# EAGLE board controller (EAGLE 9.6.2)
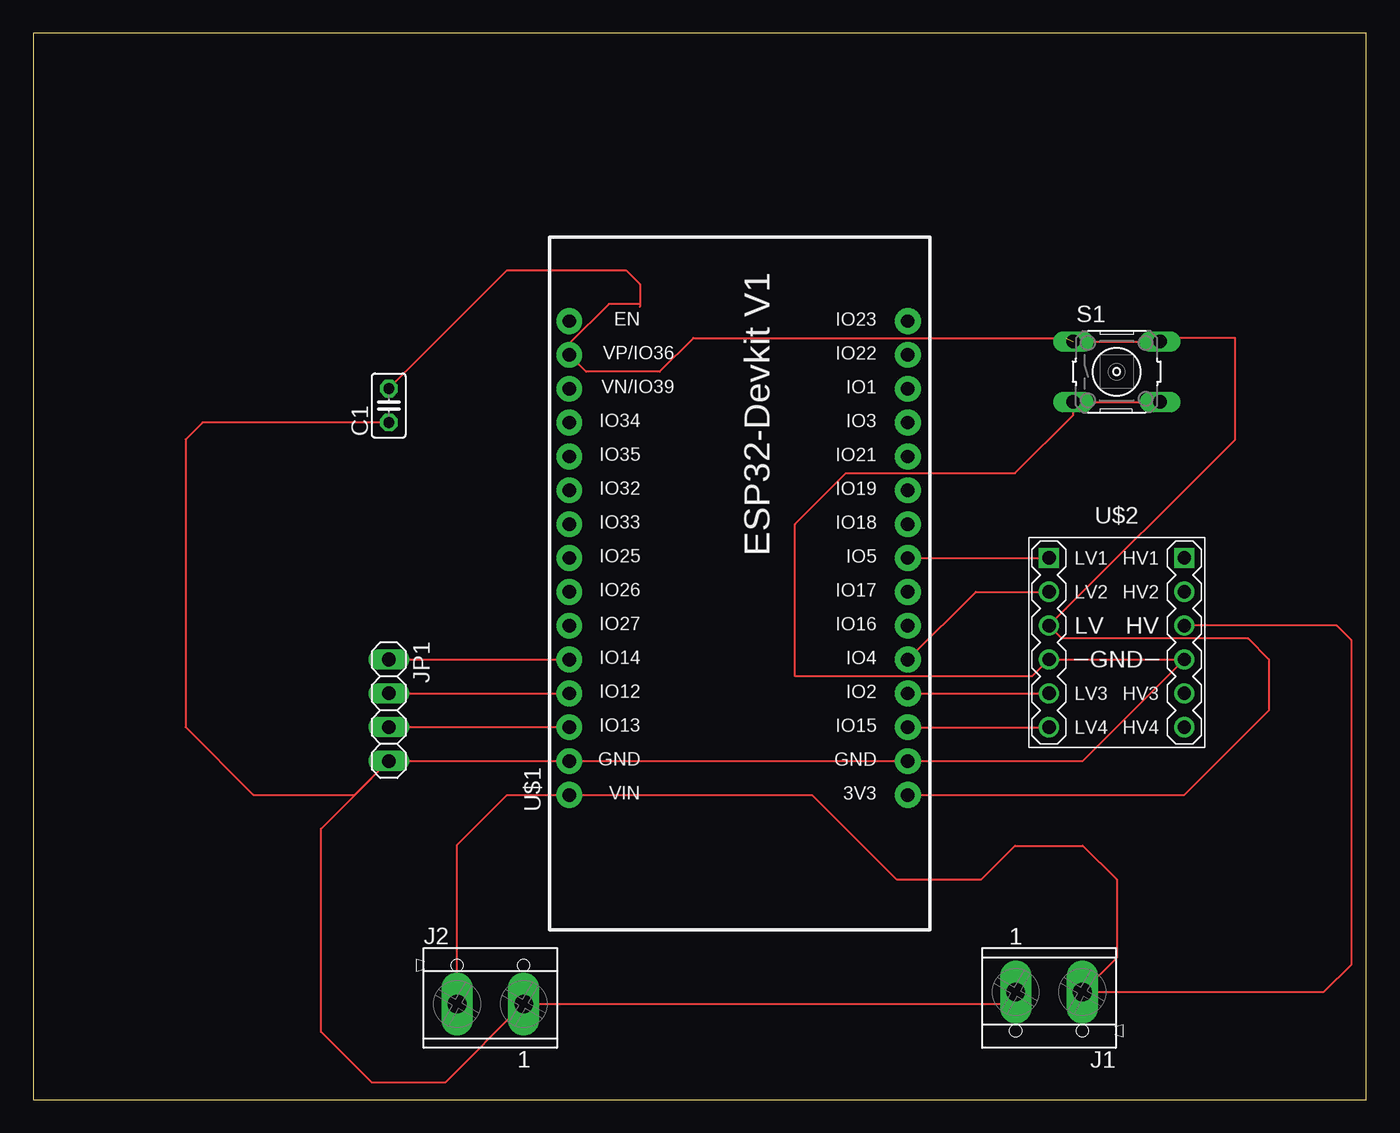
[diagram p0: board, top side]

Size 100 x 80 mm. Coordinates in mm from the lower left corner, seen from the top.
Outline: 0,0 100,0 100,80 0,80 0,0
Copper layers (1*16): Top 0.035mm / dielectric 1.5mm / Bottom 0.035mm
Design rules "default": minimum track width 6mil, minimum drill 0.35mm, track to track 6mil, track to pad 6mil, pad to pad 6mil, via to via 6mil, smd to smd 6mil, copper to edge 40mil, drill to drill 6mil, minimum pad ring 10mil, minimum via ring 8mil, stop-mask expansion 4mil, vias tented up to drill 0mil, thermal gap 10mil

## Footprints (pad centres in the part's own frame; a part is rotated, then mirrored left to right if it is on the bottom)
C025-025X050 = drill 0.813 octagon: 1 -1.27,0; 2 1.27,0
TERMINAL_BLOCK_2P_5 = drill 1.4 pad 2.38 long: 1 2.5,-0.45; 2 -2.5,-0.45
1X04 = drill 1.016 long: 1 -3.81,0; 2 -1.27,0; 3 1.27,0; 4 3.81,0
B3F-10XX = drill 1.016 long: 1 -3.251,2.261; 2 3.251,2.261; 3 -3.251,-2.261; 4 3.251,-2.261
ESP32-DEVKITV1 = drill 1 pad 1.93: 3V3 -16.52,-12.27; D1 13.96,-12.27; D2 -8.9,-12.27; D3 11.42,-12.27; D4 -6.36,-12.27; D5 1.26,-12.27; D12 -8.9,13.135; D13 -11.44,13.135; D14 -6.36,13.135; D15 -11.44,-12.27; D16 -3.82,-12.27; D17 -1.28,-12.27; D18 3.8,-12.27; D19 6.34,-12.27; D21 8.88,-12.27; D22 16.5,-12.27; D23 19.04,-12.27; D25 1.26,13.135; D26 -1.28,13.135; D27 -3.82,13.135; D32 6.34,13.135; D33 3.8,13.135; D34 11.42,13.135; D35 8.88,13.135; D36 16.5,13.135; D39 13.96,13.135; EN 19.04,13.135; GND@1 -13.98,13.135; GND@2 -13.98,-12.27; VIN -16.52,13.135
LEVEL-SHIFTER-4CH = drill 1 square: J1.1 -5.08,6.35; J2.1 5.08,6.35 | drill 1: J1.2 -5.08,3.81; J1.3 -5.08,1.27; J1.4 -5.08,-1.27; J1.5 -5.08,-3.81; J1.6 -5.08,-6.35; J2.2 5.08,3.81; J2.3 5.08,1.27; J2.4 5.08,-1.27; J2.5 5.08,-3.81; J2.6 5.08,-6.35

## Placement (x,y rotation side)
C1  [C025-025X050]  26.67,52.07 90 top
J1  CON_TERMINAL_BLOCK_02-5MM  [TERMINAL_BLOCK_2P_5]  76.2,7.62 180 top
J2  CON_TERMINAL_BLOCK_02-5MM  [TERMINAL_BLOCK_2P_5]  34.29,7.62 0 top
JP1  [1X04]  26.67,29.21 270 top
S1  [B3F-10XX]  81.28,54.61 0 top
U$1  ESP32DEVKITV1  [ESP32-DEVKITV1]  53.34,39.37 90 top
U$2  LEVEL-SHIFTER-4CH  [LEVEL-SHIFTER-4CH]  81.28,34.29 0 top

## Library data of the parts
C1 = rcl; SPICEPREFIX: C
J1 J2 = tblok
JP1 = pinhead
S1 = switch-omron; MPN: B3F-1000; OC_FARNELL: 176432; OC_NEWARK: 36M3542
U$1 = esp32-devkitv1
U$2 = diy-model

## Nets
GND: C1.1 J1.1 J2.1 JP1.4 S1.3 S1.4 U$1.GND@1 U$1.GND@2 U$2.J1.4 U$2.J2.4
HV: J1.2 J2.2 U$1.VIN U$2.J2.3
LV: C1.2 S1.1 S1.2 U$1.3V3 U$1.D36 U$2.J1.3
LV1: U$1.D5 U$2.J1.1
LV2: U$1.D4 U$2.J1.2
LV3: U$1.D2 U$2.J1.5
LV4: U$1.D15 U$2.J1.6
OUT1: JP1.1 U$1.D14
OUT2: JP1.2 U$1.D12
OUT3: JP1.3 U$1.D13

## Tracks (layer width: path | path; a pad name or v marks a point on that pad's centre or on a via)
GND
  Top 0.152: C1.1 12.7,50.8 11.43,49.53 11.43,27.94 16.51,22.86 24.13,22.86 JP1.4 | JP1.4 40.2,25.4 U$1.GND@1 66.04,25.4 66.03,25.39 U$1.GND@2 78.73,25.39 U$2.J2.4 U$2.J1.4 74.93,31.75 57.15,31.75 57.15,43.18 60.96,46.99 73.66,46.99 78.03,51.36 S1.3 83.82,52.35 | J1.1 73.66,8.07 72.76,7.17 J2.1 30.89,1.27 25.4,1.27 21.59,5.08 21.59,20.32 JP1.4 | 83.82,52.35 S1.4 84.81,52.35 85.09,52.07 84.1,52.07 83.82,52.35
HV
  Top 0.152: J2.2 31.79,19.09 35.55,22.85 U$1.VIN 58.43,22.85 64.77,16.51 71.12,16.51 73.66,19.05 78.74,19.05 81.28,16.51 81.28,10.65 J1.2 96.82,8.07 98.91,10.16 98.91,34.44 97.79,35.56 U$2.J2.3
LV  (1 unrouted)
  Top 0.152: 77.47,57.15 49.53,57.15 46.99,54.61 41.48,54.61 U$1.D36 | U$1.3V3 86.35,22.85 92.71,29.21 92.71,33.02 91.15,34.58 77.18,34.58 U$2.J1.3 | U$2.J1.3 77.47,36.83 | S1.1 S1.2 84.81,57.15 90.17,57.15 90.17,49.53 U$2.J1.3 | C1.2 35.56,62.23 44.45,62.23 45.51,61.17 45.51,59.69 | 45.51,59.69 45.51,59.48 | 45.51,59.69 43.18,59.69 40.2,56.72 U$1.D36 | U$1.D36
LV1
  Top 0.152: U$1.D5 U$2.J1.1
LV2
  Top 0.152: U$1.D4 70.7,38.1 U$2.J1.2
LV3
  Top 0.152: U$1.D2 U$2.J1.5
LV4
  Top 0.152: U$1.D15 U$2.J1.6
OUT1
  Top 0.152: JP1.1 40.2,33.02 U$1.D14
OUT2
  Top 0.152: JP1.2 40.64,30.48 40.63,30.47 U$1.D12
OUT3
  Top 0.152: JP1.3 40.2,27.94 U$1.D13